# Altium PCB Control Pilot PCB.PcbDoc
Units mm, origin at the board's own origin, x right, y up, seen from the top; angles counter-clockwise.
Board outline 125 x 75 mm, 2 copper layers (F.Cu, B.Cu); 21 components, 15 nets, 45 pads, 0 vias.
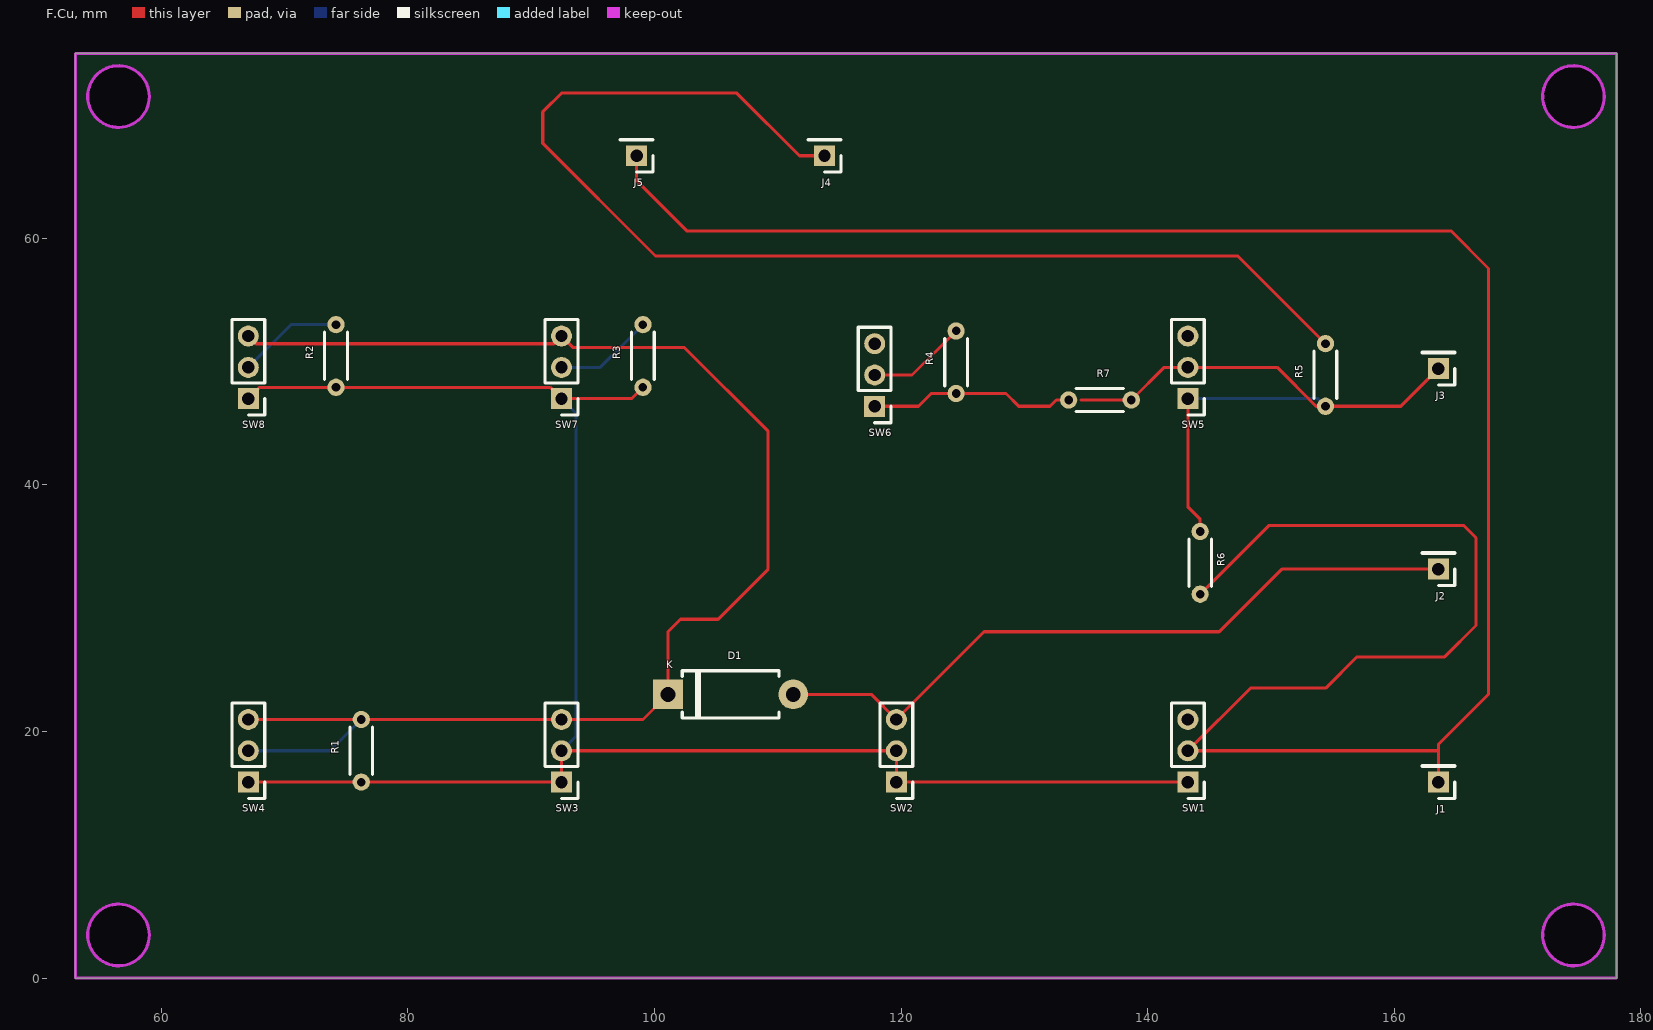
[diagram p0: F.Cu view]
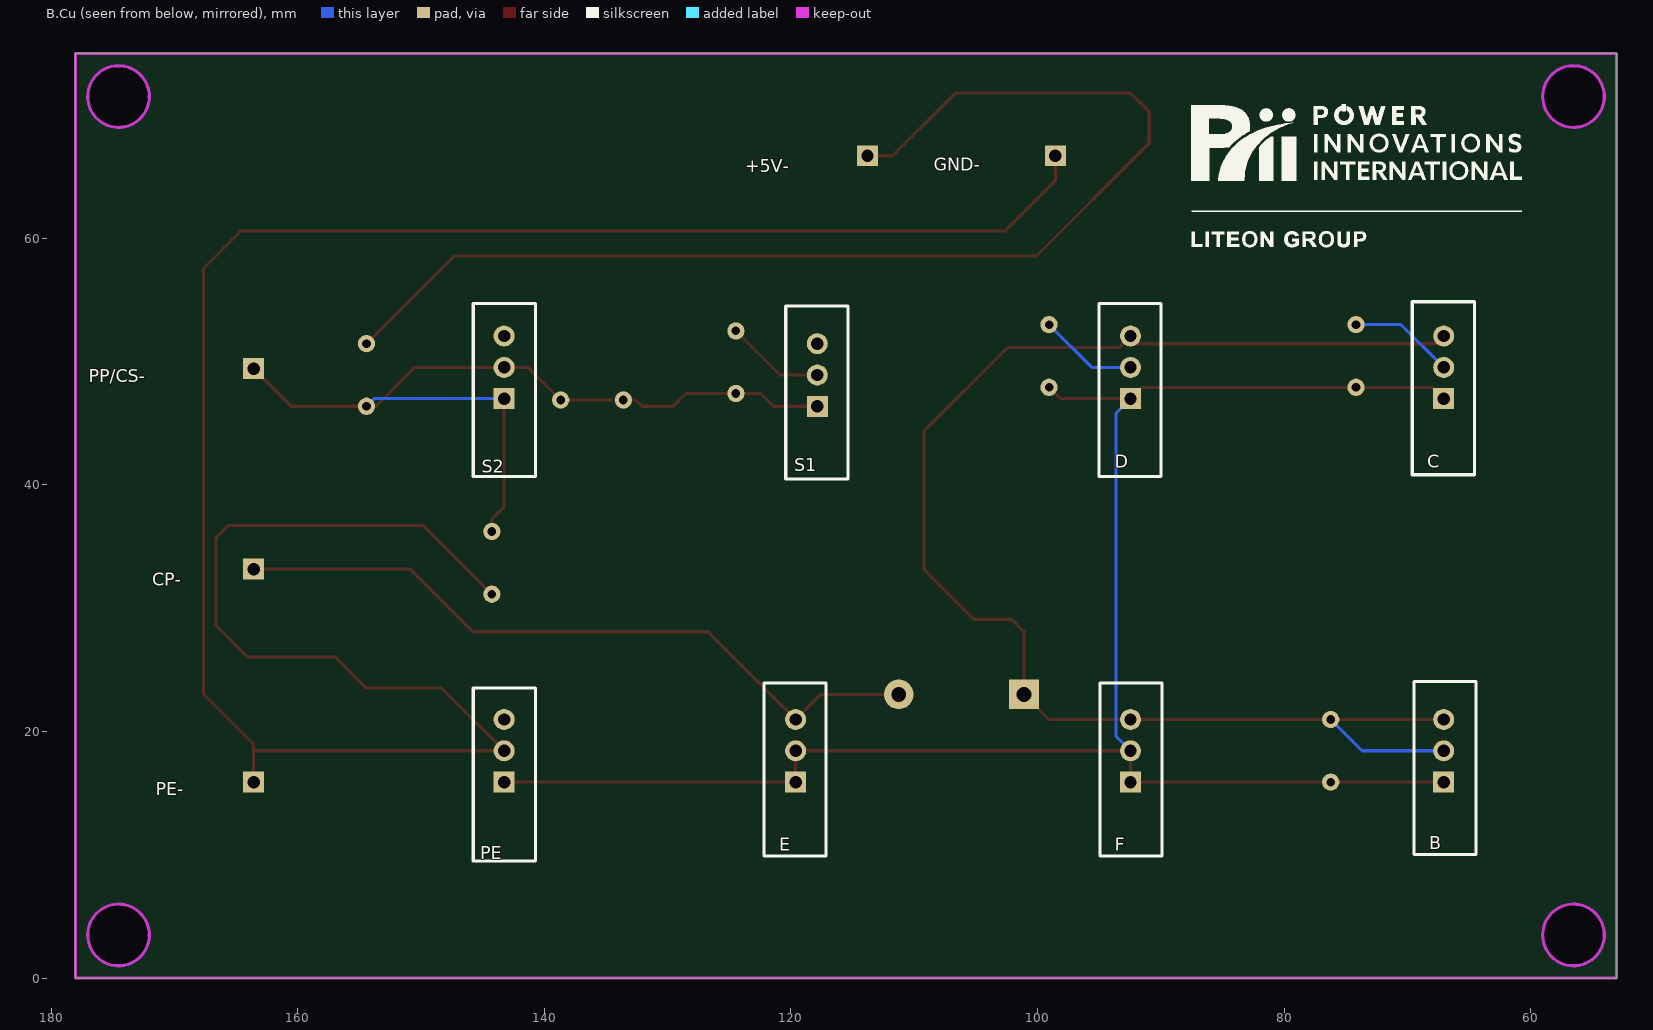
[diagram p1: B.Cu view, seen from below]

## Layer stack, top to bottom
F.Mask: solder mask 0.0102, Solder Resist, Dk 3.5
F.Cu: signal copper 0.0356
Dielectric 1: dielectric 0.32, FR-4, Dk 4.8
B.Cu: signal copper 0.0356
B.Mask: solder mask 0.0102, Solder Resist, Dk 3.5

## Board outline
53.03,75 53.03,0 178.03,0 178.03,75 53.03,75
cut-out: 54.018,71.5 54.066,71.01 54.209,70.539 54.441,70.104 54.754,69.724 55.134,69.411 55.569,69.179 56.04,69.036 56.53,68.988 57.02,69.036 57.491,69.179 57.926,69.411 58.306,69.724 58.619,70.104 58.851,70.539 58.994,71.01 59.042,71.5 58.994,71.99 58.851,72.461 58.619,72.896 58.306,73.276 57.926,73.589 57.491,73.821 57.02,73.964 56.53,74.012 56.04,73.964 55.569,73.821 55.134,73.589 54.754,73.276 54.441,72.896 54.209,72.461 54.066,71.99 54.018,71.5
cut-out: 172.018,71.5 172.066,71.01 172.209,70.539 172.441,70.104 172.754,69.724 173.134,69.411 173.569,69.179 174.04,69.036 174.53,68.988 175.02,69.036 175.491,69.179 175.926,69.411 176.306,69.724 176.619,70.104 176.851,70.539 176.994,71.01 177.042,71.5 176.994,71.99 176.851,72.461 176.619,72.896 176.306,73.276 175.926,73.589 175.491,73.821 175.02,73.964 174.53,74.012 174.04,73.964 173.569,73.821 173.134,73.589 172.754,73.276 172.441,72.896 172.209,72.461 172.066,71.99 172.018,71.5
cut-out: 172.018,3.5 172.066,3.01 172.209,2.539 172.441,2.104 172.754,1.724 173.134,1.411 173.569,1.179 174.04,1.036 174.53,0.988 175.02,1.036 175.491,1.179 175.926,1.411 176.306,1.724 176.619,2.104 176.851,2.539 176.994,3.01 177.042,3.5 176.994,3.99 176.851,4.461 176.619,4.896 176.306,5.276 175.926,5.589 175.491,5.821 175.02,5.964 174.53,6.012 174.04,5.964 173.569,5.821 173.134,5.589 172.754,5.276 172.441,4.896 172.209,4.461 172.066,3.99 172.018,3.5
cut-out: 54.018,3.5 54.066,3.01 54.209,2.539 54.441,2.104 54.754,1.724 55.134,1.411 55.569,1.179 56.04,1.036 56.53,0.988 57.02,1.036 57.491,1.179 57.926,1.411 58.306,1.724 58.619,2.104 58.851,2.539 58.994,3.01 59.042,3.5 58.994,3.99 58.851,4.461 58.619,4.896 58.306,5.276 57.926,5.589 57.491,5.821 57.02,5.964 56.53,6.012 56.04,5.964 55.569,5.821 55.134,5.589 54.754,5.276 54.441,4.896 54.209,4.461 54.066,3.99 54.018,3.5

## Design rules (kind name [scope] priority, off if disabled: settings)
Clearance [All] p1: gap=0.254 ignorepadtopadclearanceinfootprint=FALSE except(0: Arc-Hole Track-Hole SMDPad-Hole THPad-Hole Via-Hole Fill-Hole Poly-Hole Region-Hole Text-Hole)
MinimumSolderMaskSliver [All] p1: minsoldermaskwidth=0
PolygonConnect [All] p1: connectstyle=Direct reliefconductorwidth=0.254 reliefentries=4 polygonreliefangle="90 Angle" airgapwidth=0.254
RoutingVias [All] p1: holewidth=0.711 width=1.27 viastyle="Through Hole" minholewidth=0.711 minwidth=1.27 maxholewidth=0.711 maxwidth=1.27
SilkToSilkClearance [All] p1: silktosilkclearance=0
SilkToSolderMaskClearance [IsPad] p1: minsilkscreentomaskgap=0 clearancetoexposedcopper=TRUE
SolderMaskExpansion [All] p1: expansion=0.102 istentingtop=FALSE
Width [All] p1: maxlimit=10 minlimit=0.254 preferedwidth=0.254 minimp=50.000000 maximp=50.000000 favimp=50.000000
27 further rules are at their usual default settings.

## Components (designator, comment, footprint, x,y, rotation, side; value= is the part's Value field where it differs from the comment)
D1 "D" D_DO-15_P10.16mm_Horizontal 101.092,23.01 r0 top
J1 "Conn_01x01" PinHeader_1x01_P2.54mm_Vertical 163.576,15.898 r180 top
J2 "Conn_01x01" PinHeader_1x01_P2.54mm_Vertical 163.576,33.17 r180 top
J3 "Conn_01x01" PinHeader_1x01_P2.54mm_Vertical 163.576,49.426 r180 top
J4 "Conn_01x01" PinHeader_1x01_P2.54mm_Vertical 113.792,66.698 r180 top
J5 "Conn_01x01" PinHeader_1x01_P2.54mm_Vertical 98.552,66.698 r180 top
R1 "2.74K" R_Axial_DIN0204_L3.6mm_D1.6mm_P5.08mm_Horizontal 76.216,15.898 r90 top
R2 "1.3K" R_Axial_DIN0204_L3.6mm_D1.6mm_P5.08mm_Horizontal 74.168,47.918 r90 top
R3 "270" R_Axial_DIN0204_L3.6mm_D1.6mm_P5.08mm_Horizontal 99.06,47.918 r90 top
R4 "330" R_Axial_DIN0204_L3.6mm_D1.6mm_P5.08mm_Horizontal 124.46,47.41 r90 top
R5 "330" R_Axial_DIN0204_L3.6mm_D1.6mm_P5.08mm_Horizontal 154.416,46.378 r90 top
R6 "2.7K" R_Axial_DIN0204_L3.6mm_D1.6mm_P5.08mm_Horizontal 144.256,36.218 r270 top
R7 "150" R_Axial_DIN0204_L3.6mm_D1.6mm_P5.08mm_Horizontal 133.588,46.886 r0 top
SW1 "SW_SPDT" PinHeader_1x03_P2.54mm_Vertical 143.256,15.898 r180 top
SW2 "SW_SPDT" PinHeader_1x03_P2.54mm_Vertical 119.616,15.898 r180 top
SW3 "SW_SPDT" PinHeader_1x03_P2.54mm_Vertical 92.456,15.898 r180 top
SW4 "SW_SPDT" PinHeader_1x03_P2.54mm_Vertical 67.056,15.898 r180 top
SW5 "SW_SPDT" PinHeader_1x03_P2.54mm_Vertical 143.256,46.993 r180 top
SW6 "SW_SPDT" PinHeader_1x03_P2.54mm_Vertical 117.856,46.378 r180 top
SW7 "SW_SPDT" PinHeader_1x03_P2.54mm_Vertical 92.456,46.993 r180 top
SW8 "SW_SPDT" PinHeader_1x03_P2.54mm_Vertical 67.056,46.993 r180 top

## Footprints (in the part's own frame and the unit in brackets; to place one, negate y for a bottom-side part, rotate by r counter-clockwise, add the part's x,y. Pads: shape width x height; smd on the part's side, far side on the other; paste and mask are expansions set on the pad)
D_DO-15_P10.16mm_Horizontal [mm]
  rect 2.4x2.4 hole 1.2 paste-2539.97 mask+0: 1(0,0)
  rrect100% 2.4x2.4 hole 1.2 paste-2539.97 mask+0: 2(10.16,0)
  silkscreen extent 1.16,-1.92 9,1.92
PinHeader_1x01_P2.54mm_Vertical [mm]
  rect 1.7x1.7 hole 1 paste-2539.97 mask+0: 1(0,0)
  silkscreen extent -1.33,-1.33 1.33,1.33
PinHeader_1x03_P2.54mm_Vertical [mm]
  rect 1.7x1.7 hole 1 paste-2539.97 mask+0: 1(0,0)
  rrect100% 1.7x1.7 hole 1 paste-2539.97 mask+0: 2(0,-2.54) 3(0,-5.08)
  silkscreen extent -1.33,-6.41 1.33,1.33
R_Axial_DIN0204_L3.6mm_D1.6mm_P5.08mm_Horizontal [mm]
  round 1.4 hole 0.7 paste-2539.97 mask+0: 1(0,0)
  rrect100% 1.4x1.4 hole 0.7 paste-2539.97 mask+0: 2(5.08,0)
  silkscreen extent 0.62,-0.92 4.46,0.92

## Part data
D1: library part D_DO-15_P10.16mm_Horizontal, "Diode, DO-15 series, Axial, Horizontal, pin pitch=10.16mm, , length*diameter=7.6*3.6mm^2, , http://www.diodes.com/_files/packages/DO-15.pdf", Sheetfile="Control Pilot PCB.kicad_sch", Sim.Device=D, Sim.Pins="1=K 2=A", ki_description=Diode, ki_keywords=diode
J1 J2 J3 J4 J5: library part PinHeader_1x01_P2.54mm_Vertical, "Through hole straight pin header, 1x01, 2.54mm pitch, single row", Sheetfile="Control Pilot PCB.kicad_sch", ki_description="Generic connector, single row, 01x01, script generated (kicad-library-utils/schlib/autogen/connector/)", ki_keywords=connector
R1 R2 R3 R4 R5 R6 R7: library part R_Axial_DIN0204_L3.6mm_D1.6mm_P5.08mm_Horizontal, "Resistor, Axial_DIN0204 series, Axial, Horizontal, pin pitch=5.08mm, 0.167W, length*diameter=3.6*1.6mm^2, http://cdn-reichelt.de/documents/datenblatt/B400/1_4W%23YAG.pdf", Sheetfile="Control Pilot PCB.kicad_sch", ki_description="Resistor, US symbol", ki_keywords="R res resistor"
SW1 SW2 SW3 SW4 SW5 SW6 SW7 SW8: library part PinHeader_1x03_P2.54mm_Vertical, "Through hole straight pin header, 1x03, 2.54mm pitch, single row", Sheetfile="Control Pilot PCB.kicad_sch", ki_description="Switch, single pole double throw", ki_keywords="switch single-pole double-throw spdt ON-ON"

## Nets (pads, with @x,y where several pads share a name; then routed paths per layer and width w, separated by ;. In a path a pad name is that pad's centre, name@x,y a point inside that pad or via, vN(x,y) a via of type N, cw(c..) or ccw(c..) an arc to the next point about the centre after c; other vN are vias at no path point)
+5V: J4.1 R5.2 | length 98.4
  F.Cu w0.25: J4.1 111.76,66.698 106.68,71.778 92.456,71.778 90.932,70.254 90.932,67.714 100.076,58.57 147.304,58.57 R5.2
Earth_Protective: J1.1 J5.1 R6.2 SW1.2 | length 197.5
  F.Cu w0.25: J5.1 98.552,64.666 102.616,60.602 164.592,60.602 167.64,57.554 167.64,23.01 163.576,18.946 163.576,18.438 ; R6.2 149.844,36.726 150.876,36.726 165.608,36.726 166.624,35.71 166.624,28.598 164.084,26.058 156.972,26.058 154.432,23.518 148.336,23.518 SW1.2 163.576,18.438 ; J1.1 163.576,18.438
Net-(D1-A): D1.2 J2.1 SW2.3 | length 58.2
  F.Cu w0.25: D1.2 117.584,23.01 SW2.3 126.728,28.09 145.796,28.09 150.876,33.17 J2.1
Net-(D1-K): D1.1 SW3.3 SW4.3 SW7.3 SW8.3 | length 107.2
  F.Cu w0.25: SW4.3 SW3.3 99.06,20.978 D1.1 101.092,28.09 102.108,29.106 105.156,29.106 109.22,33.17 109.22,44.346 102.436,51.13 93.399,51.13 SW7.3 91.833,51.45 67.679,51.45 SW8.3
Net-(J3-Pin_1): J3.1 R7.2 SW5.2 | length 32.7
  F.Cu w0.25: 134.588,46.886 138.684,46.886 141.331,49.533 SW5.2 150.498,49.533 153.653,46.378 160.528,46.378 J3.1
Net-(SW1-A): R1.1 R2.1 R3.1 SW1.1 SW2.1 SW2.2 SW3.1 SW3.2 SW4.1 SW7.1 SW8.1 | length 144
  F.Cu w0.25: SW4.1 R1.1 SW3.1 SW3.2 SW2.2 SW2.1 SW1.1 ; SW8.1 67.981,47.918 R2.1 91.531,47.918 SW7.1 98.135,46.993 R3.1
  B.Cu w0.25: SW3.2 93.631,19.613 93.631,45.818 SW7.1
Net-(SW4-B): R1.2 SW4.2 | length 10.2
  B.Cu w0.25: SW4.2 73.676,18.438 R1.2
Net-(SW5-A): R5.1 R6.1 SW5.1 | length 22.6
  F.Cu w0.25: SW5.1 143.256,38.218 144.256,37.218 R6.1
  B.Cu w0.25: SW5.1 153.801,46.993 R5.1
Net-(SW6-A): R4.1 R7.1 SW6.1 | length 16.8
  F.Cu w0.25: SW6.1 121.412,46.378 122.444,47.41 R4.1 128.508,47.41 129.54,46.378 132.08,46.378 132.588,46.886 R7.1
Net-(SW6-B): R4.2 SW6.2 | length 8.1
  F.Cu w0.25: SW6.2 120.888,48.918 R4.2
Net-(SW7-B): R3.2 SW7.2 | length 8
  B.Cu w0.25: SW7.2 95.595,49.533 R3.2
Net-(SW8-B): R2.2 SW8.2 | length 8.5
  B.Cu w0.25: SW8.2 70.521,52.998 R2.2
unconnected-(SW1-C-Pad3): SW1.3
unconnected-(SW5-C-Pad3): SW5.3
unconnected-(SW6-C-Pad3): SW6.3

## Keep-outs
Edge.Cuts:
  circle w0.254: c174.53,71.5 r2.5
  circle w0.254: c174.53,3.5 r2.5
  circle w0.254: c56.53,3.5 r2.5
  circle w0.254: c56.53,71.5 r2.5
  circle w0: c56.53,71.5 r2.5
  lines w0: 53.03,0 178.03,0 178.03,75 53.03,75 53.03,0
  lines w0.254: 53.03,0 178.03,0 178.03,75 53.03,75 53.03,0

## Silkscreen, mask and mechanical layers (free items; w line width, h text height)
B.SilkS:
  drawing of 80 lines, arcs and shapes, not listed
  text "GND-" at 108.43,65.122 h1.75
  text "+5V-" at 123.69,64.997 h1.75
  text "PP/CS-" at 176.95,47.962 h1.75
  text "C" at 68.38,41.012 h1.75
  text "D" at 93.72,41.025 h1.75
  text "S1" at 119.74,40.742 h1.75
  text "S2" at 145.08,40.602 h1.75
  text "CP-" at 171.78,31.472 h1.75
  text "PE-" at 171.5,14.465 h1.75
  text "B" at 68.24,10.105 h1.75
  text "F" at 93.72,9.965 h1.75
  text "E" at 120.96,9.965 h1.75
  text "PE" at 145.21,9.285 h1.75

## Text inside footprints (layer, text, board x,y; h text height)
D1: F.Fab "K" at 100.968,24.933 h1; F.SilkS "K" at 100.968,24.933 h1